# Altium PCB COMBINED.PcbDoc (part 1 of 3)
Units mil, origin at the board's own origin, x right, y up, seen from the top; angles counter-clockwise.
Board outline 6800 x 2100 mil, 4 copper layers (Top Layer, Mid-Layer 1, Mid-Layer 2, Bottom Layer); 221 components, 0 nets, 1007 pads, 208 vias.
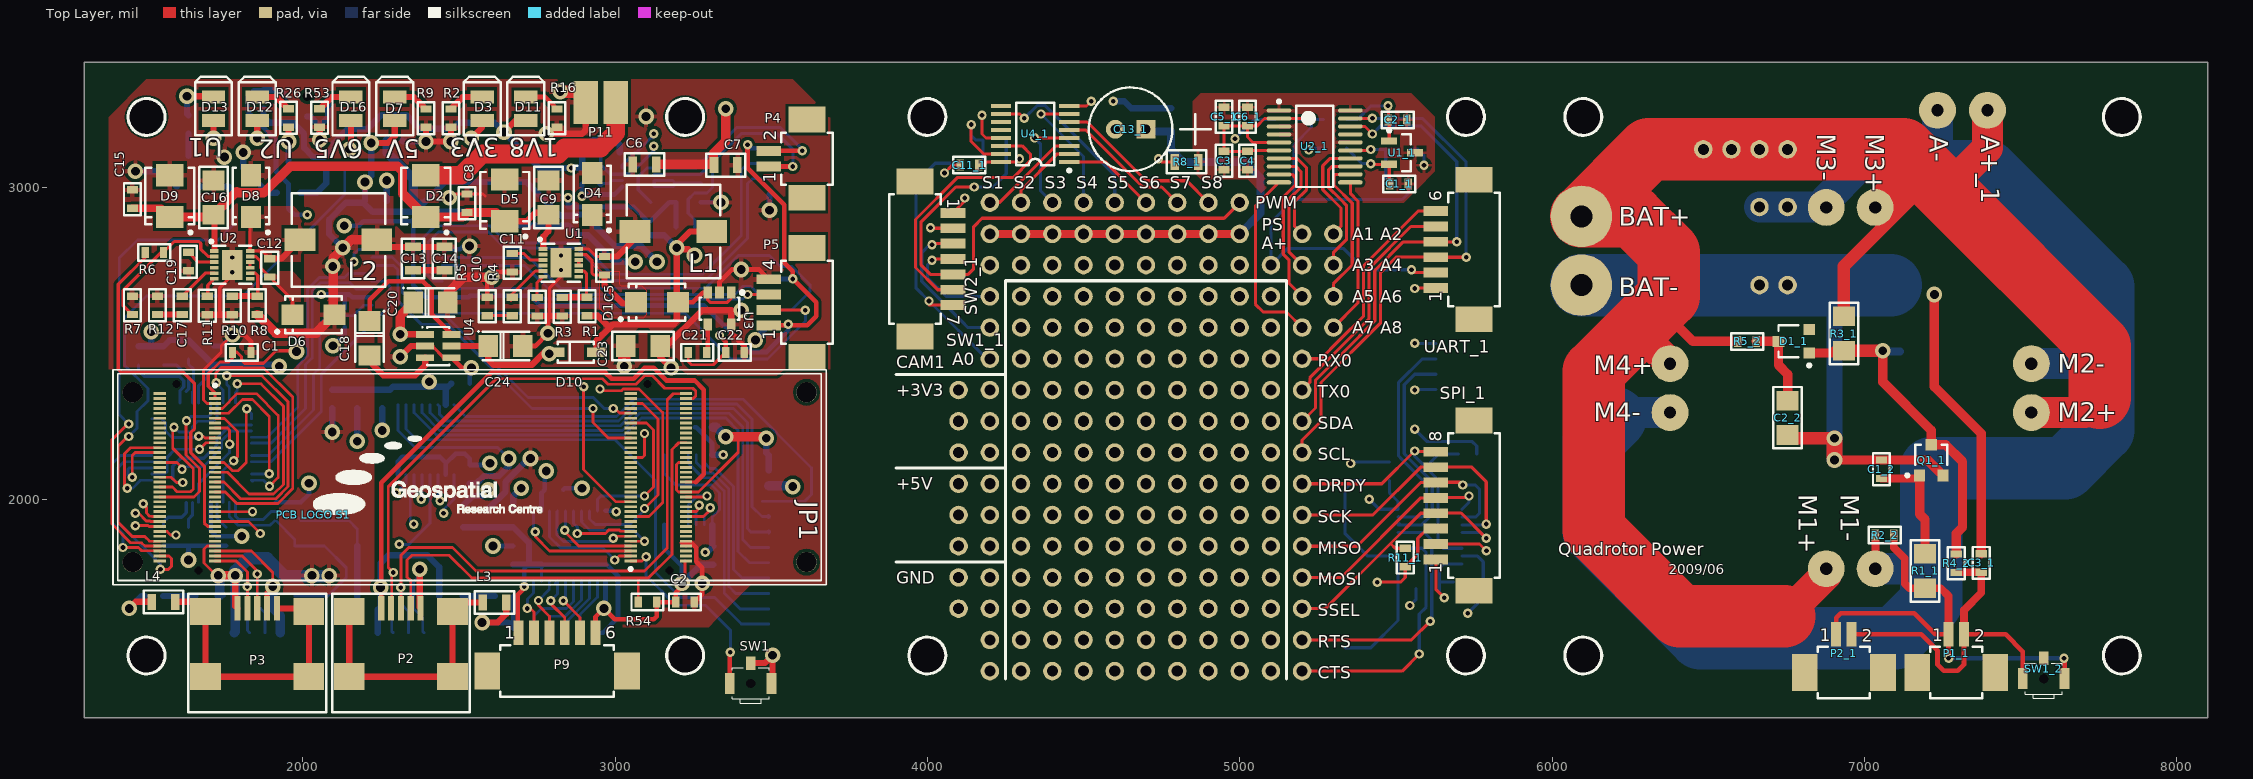
[diagram p0: Top Layer view]
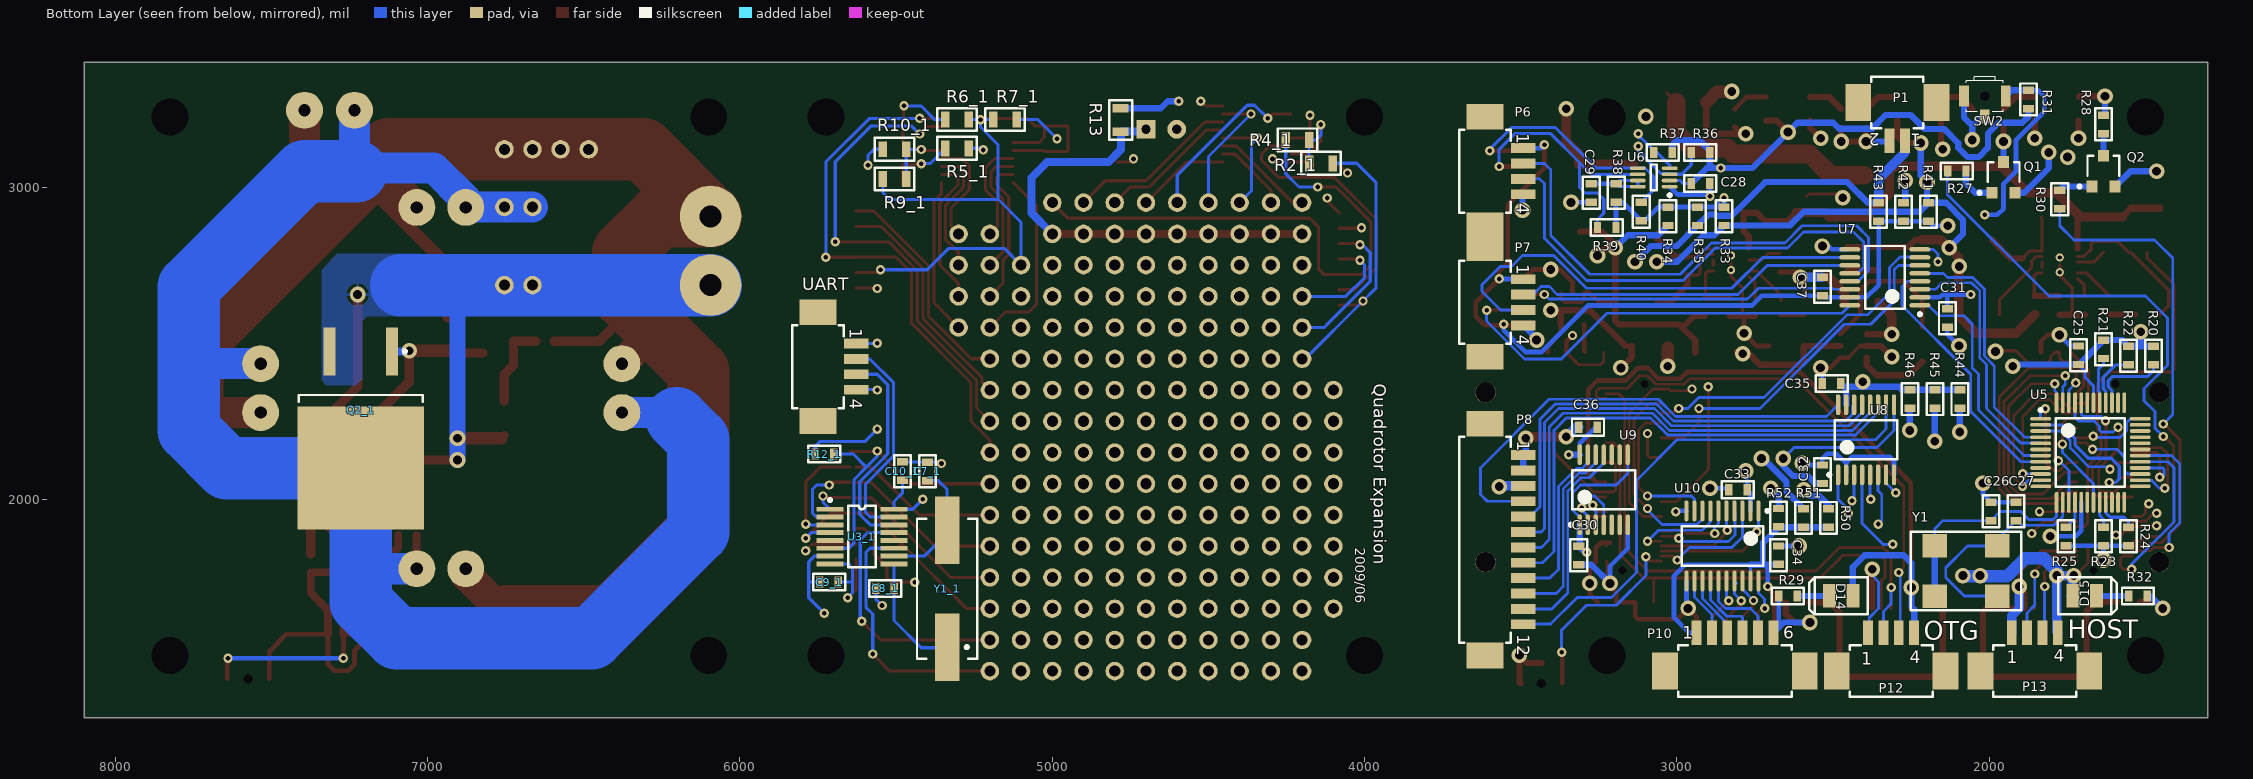
[diagram p1: Bottom Layer view, seen from below]
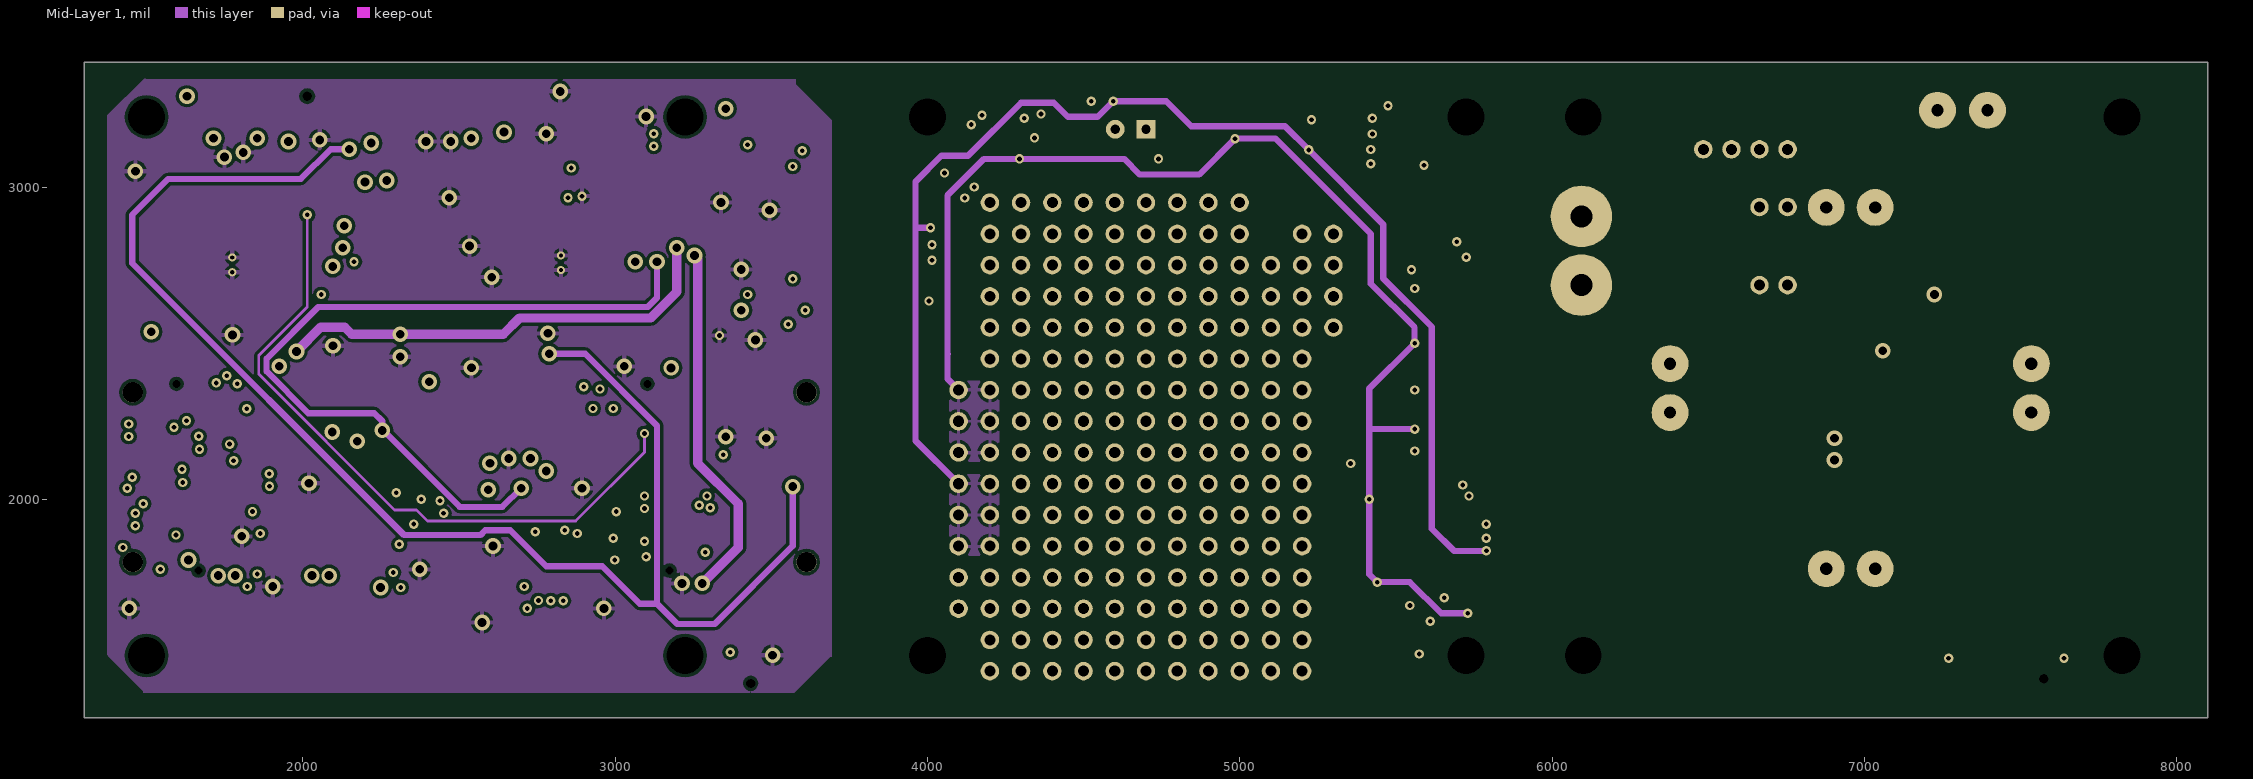
[diagram p2: Mid-Layer 1]
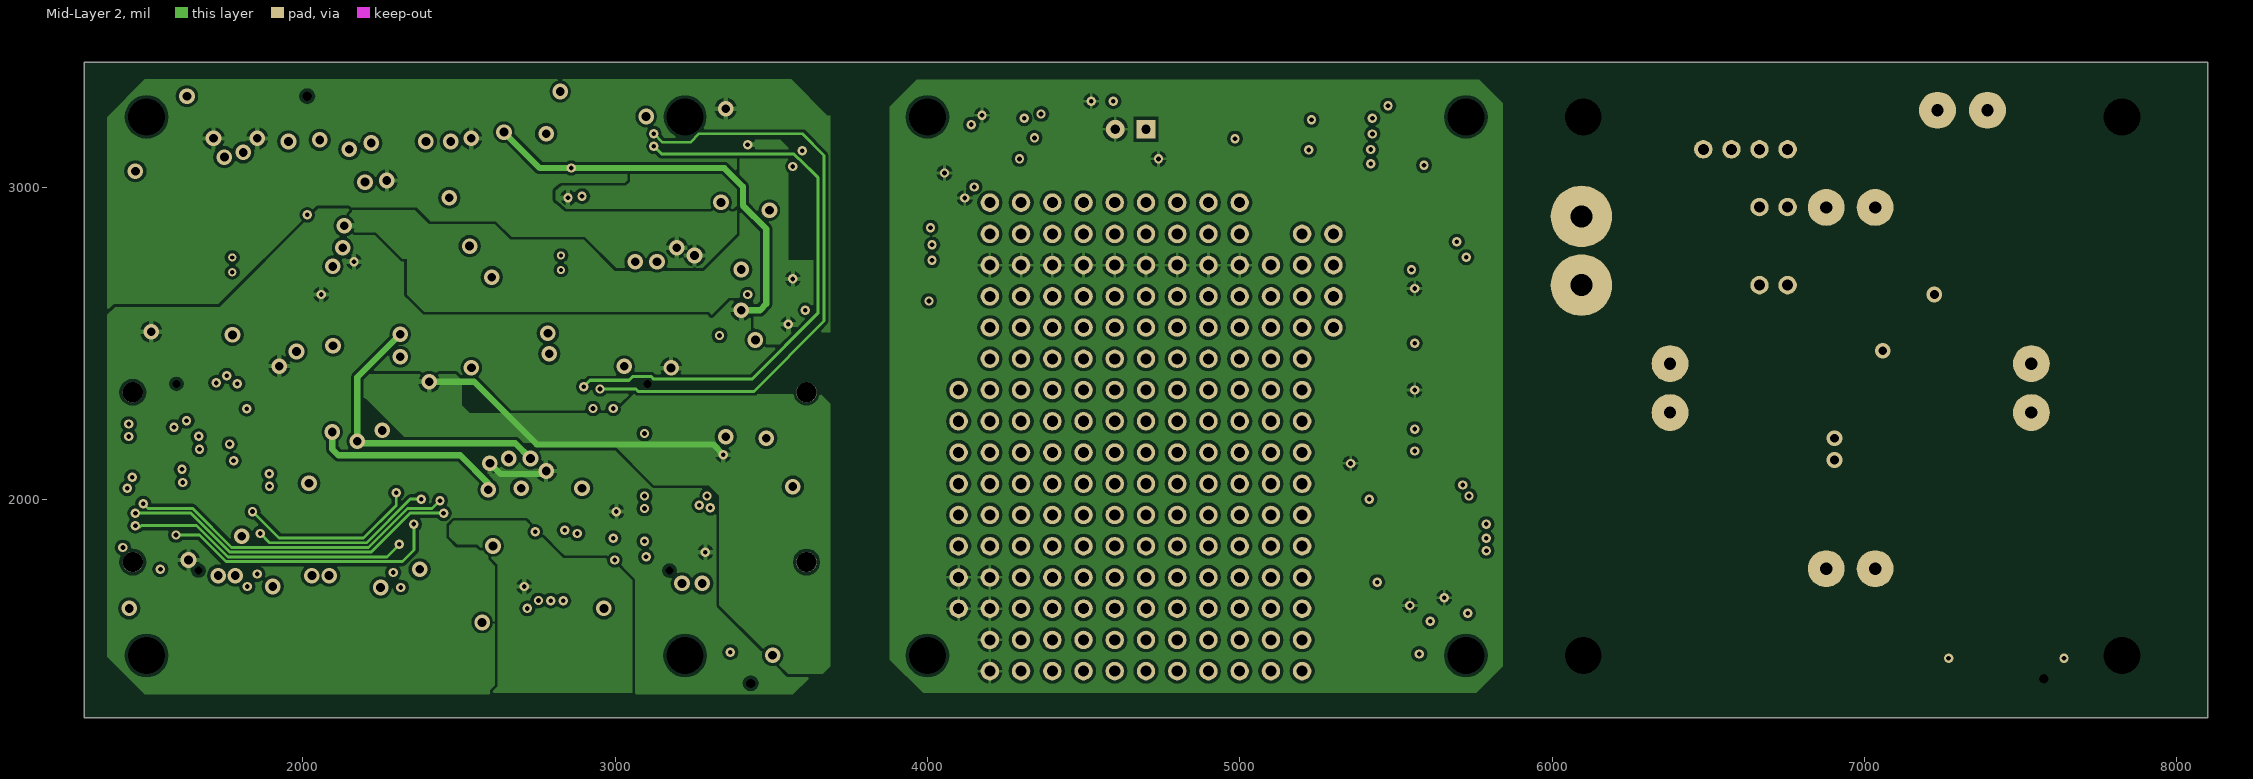
[diagram p3: Mid-Layer 2]

## Layer stack, top to bottom
Top Layer: signal copper 1.4
Dielectric: dielectric 12.6, FR-4, Dk 4.8
Mid-Layer 1: signal copper 1.4
Dielectric: dielectric 12.6, FR-4, Dk 4.8
Mid-Layer 2: signal copper 1.4
Dielectric: dielectric 12.6, FR-4, Dk 4.8
Bottom Layer: signal copper 1.4

## Board outline
1300,1300 1300,3400 8100,3400 8100,1300

## Design rules (kind name [scope] priority, off if disabled: settings)
Clearance [All] p1 off: gap=10
ComponentClearance [All] p1 off: gap=10 collisioncheckmode=3 verticalgap=10 showdistances=FALSE
DiffPairsRouting [All] p1 off: maxlimit=10 minlimit=10 mostfreqgap=10 maxuncoupledlength=500
FanoutControl Fanout_BGA [IsBGA] p1 off: bgadir=Out bgaviamode=Centered fanoutstyle=Auto fanoutdirection=Alternating viagrid=1 // Fanout_BGA (Default Rule)
FanoutControl Fanout_LCC [IsLCC] p2 off: bgadir=Out bgaviamode=Centered fanoutstyle=Auto fanoutdirection=Alternating viagrid=1 // Fanout_LCC (Default Rule)
FanoutControl Fanout_SOIC [IsSOIC] p3 off: bgadir=Out bgaviamode=Centered fanoutstyle=Auto fanoutdirection=Alternating viagrid=1 // Fanout_SOIC (Default Rule)
FanoutControl Fanout_Small [(CompPinCount < 5)] p4 off: bgadir=Out bgaviamode=Centered fanoutstyle=Auto fanoutdirection=OutThenIn viagrid=1 // Fanout_Small (Default Rule)
FanoutControl Fanout_Default [All] p5 off: bgadir=Out bgaviamode=Centered fanoutstyle=Auto fanoutdirection=Alternating viagrid=1 // Fanout_Default (Default Rule)
Height [All] p1 off: minheight=0 maxheight=1000 prefheight=500
HoleSize [All] p1 off: absolutevalues=TRUE maxlimit=100 minlimit=1 maxpercent=80.000 minpercent=20.000
HoleToHoleClearance [All] p1 off: gap=10 allowstackedmicrovias=TRUE
LayerPairs [All] p1 off: enforce=TRUE
MinimumSolderMaskSliver [All] p1 off: minsoldermaskwidth=10
NetAntennae [All] p1 off: netantennaetolerance=0
PasteMaskExpansion [All] p1 off: expansion=0
PlaneClearance [All] p1 off: clearance=20
PlaneConnect [All] p1 off: planeconnectstyle=Relief reliefexpansion=20 reliefentries=4 reliefconductorwidth=10 reliefairgap=10
PolygonConnect [All] p1 off: connectstyle=Relief reliefconductorwidth=10 reliefentries=4 polygonreliefangle="90 Angle"
RoutingCorners [All] p1 off: cornerstyle=45-Degree minsetback=100 maxsetback=100
RoutingLayers [All] p1 off: top layer_v5=TRUE mid layer 1_v5=TRUE mid layer 2_v5=TRUE bottom layer_v5=TRUE
RoutingPriority [All] p1 off: routingpriority=0
RoutingTopology [All] p1 off: topology=Shortest
RoutingVias [All] p1 off: holewidth=28 width=50 viastyle="Through Hole" minholewidth=28 minwidth=50 maxholewidth=28 maxwidth=50
ShortCircuit [All] p1 off: allowed=FALSE
SilkToSilkClearance [All] p1 off: silktosilkclearance=10
SilkscreenOverComponentPads [All] p1 off: minsilkscreentomaskgap=10
SolderMaskExpansion [All] p1 off: expansion=4
TestPointUsage [All] p1 off: valid=0 allowmultiple=FALSE
Testpoint [All] p1 off: side=15 testpointundercomponent=TRUE minsize=40 maxsize=100 preferedsize=60 minholesize=0 maxholesize=40 preferedholesize=32 testpointgrid=1 style=1023 order=0123456789
UnRoutedNet [All] p1 off:
Width [All] p1 off: maxlimit=10 minlimit=10 preferedwidth=10

## Components (designator, comment, footprint, x,y, rotation, side; value= is the part's Value field where it differs from the comment)
A0 "" PAD_ROUND 4200,2450 r0 top locked
A1 "" PAD_ROUND 5200,2850 r90 top locked
A2 "" PAD_ROUND 5300,2850 r90 top locked
A3 "" PAD_ROUND 5200,2750 r90 top locked
A4 "" PAD_ROUND 5300,2750 r0 top locked
A5 "" PAD_ROUND 5200,2650 r90 top locked
A6 "" PAD_ROUND 5300,2650 r0 top locked
A7 "" PAD_ROUND 5200,2550 r0 top locked
A8 "" PAD_ROUND 5300,2550 r0 top locked
A+ "" PAD_ROUND 5100,2750 r0 top locked
A+_1 "" BOOZ_MOTOR#1 7394.33,3245.83 r90 top locked (schematic designator A+)
A- "" BOOZ_MOTOR#1 7234.33,3245.83 r90 top locked
BAT+ "" BOOZ_POWER 6094.33,2905.83 r270 top locked
BAT- "" BOOZ_POWER 6094.33,2685.83 r90 top locked
C1 "100nF" 0603 1834.33,2470.83 r180 top locked
C1_1 "100nF" 0603 5540,3010 r180 top locked (schematic designator C1)
C1_2 "100nF" 0603 7054.33,2125.83 r270 top locked (schematic designator C1)
C2 "100nF" 0603 3194.33,1670.83 r0 top locked
C2_1 "100nF" 0603 5535,3215 r180 top locked (schematic designator C2)
C2_2 "CP_10uF_25V_1206" 1206 6754.33,2205.83 r90 top locked (schematic designator C2)
C3 "1uF" 0603 4950,3055 r90 top locked
C3_1 "1uF" 0603 7374.33,1825.83 r270 top locked (schematic designator C3)
C4 "100nF" 0603 5025,3055 r90 top locked
C5 "CP_470n 0603 25V X5R" 0603 2966.54,2777.52 r270 top locked
C5_1 "100nF" 0603 4950,3255 r270 top locked (schematic designator C5)
C6 "10uF" 0805 3094.33,3070.83 r180 top locked
C6_1 "100nF" 0603 5025,3255 r270 top locked (schematic designator C6)
C7 "10uF" 0805 3354.33,3070.83 r0 top locked
C7_1 "Cap" 0603 5400,2060 r90 bottom locked (schematic designator C7)
C8 "100nF" 0603 2526.54,2977.52 r270 top locked
C8_1 "Cap" 0603 5565,1715 r180 bottom locked (schematic designator C8)
C9 "CP_2u2 1206" 1206 2786.54,2910.83 r90 top locked
C9_1 "100nF" 0603 5685,1735 r0 bottom locked (schematic designator C9)
C10 "CP_330pF 0603" 0603 2670.87,2647.17 r270 top locked
C10_1 "100nF" 0603 5480,2120 r270 bottom locked (schematic designator C10)
C11 "CP_470n 0603 25V X5R" 0603 2670.87,2787.17 r270 top locked
C11_1 "100nF" 0603 4105,3070 r0 top locked (schematic designator C11)
C12 "CP_470n 0603 25V X5R" 0603 1894.33,2770.83 r270 top locked
C13 "10uF" 0805 2354.33,2770.83 r270 top locked
C13_1 "CP_POL_100uF_25V_6.3mm" CAP_ELECTRO_6.3x11 4700,3185 r180 top locked (schematic designator C13)
C14 "10uF" 0805 2454.33,2770.83 r270 top locked
C15 "100nF" 0603 1454.33,2990.83 r270 top locked
C16 "CP_2u2 1206" 1206 1714.33,2910.83 r90 top locked
C17 "CP_330pF 0603" 0603 1614.33,2650.83 r270 top locked
C18 "10uF" 1206P 2214.33,2570.83 r270 top locked
C19 "CP_470n 0603 25V X5R" 0603 1634.33,2790.83 r270 top locked
C20 "10uF" 1206P 2354.33,2630.83 r0 top locked
C21 "10n" 0603 3234.33,2470.83 r0 top locked
C22 "100nF" 0603 3354.33,2470.83 r0 top locked
C23 "CP_2u2_50V_1206" 1206 3034.33,2490.83 r0 top locked
C24 "10uF" 1206P 2594.33,2490.83 r0 top locked
C25 "100nF" 0603 1714.33,2490.83 r270 bottom locked
C26 "18pF" 0603 1994.33,1990.83 r270 bottom locked
C27 "18pF" 0603 1914.33,1990.83 r270 bottom locked
C28 "100nF" 0603 2954.33,3010.83 r180 bottom locked
C29 "100nF" 0603 3274.33,3010.83 r270 bottom locked
C30 "100nF" 0603 3314.33,1790.83 r90 bottom locked
C31 "100nF" 0603 2134.33,2550.83 r90 bottom locked
C32 "100nF" 0603 2534.33,2050.83 r90 bottom locked
C33 "100nF" 0603 2834.33,2030.83 r180 bottom locked
C34 "100nF" 0603 2674.33,1850.83 r270 bottom locked
C35 "100nF" 0603 2534.33,2370.83 r180 bottom locked
C36 "100nF" 0603 3314.33,2230.83 r180 bottom locked
C37 "100nF" 0603 2534.33,2710.83 r270 bottom locked
CAM1 "7 Pin Header" CONN_7X1_SMT_RA_1.25MM 3960,2745 r270 top locked
CTS "" PAD_ROUND 5200,1450 r90 top locked
D1 "2A/40V" SMA_DIODE 3134.33,2630.83 r180 top locked
D1_1 "BAS70" SOT23 6774.33,2505.83 r90 top locked (schematic designator D1)
D2 "2A/100V" SMB_DIODE 2394.33,2970.83 r270 top locked
D3 "LED Green" Diode_0805 2574.33,3250.83 r90 top locked
D4 "2A/40V" SMA_DIODE 2926.54,2977.52 r270 top locked
D5 "TVS 40V" SMB_DIODE 2646.54,2957.52 r270 top locked
D6 "2A/40V" SMA_DIODE 2034.33,2590.83 r180 top locked
D7 "LED Green" Diode_0805 2294.33,3250.83 r90 top locked
D8 "2A/40V" SMA_DIODE 1834.33,2970.83 r270 top locked
D9 "TVS 40V" SMB_DIODE 1574.33,2970.83 r270 top locked
D10 "MBR0520LT1G" SOD123 2874.33,2470.83 r180 top locked
D11 "LED Red" Diode_0805 2714.33,3250.83 r90 top locked
D12 "LED Red" Diode_0805 1854.33,3250.83 r90 top locked
D13 "LED Green" Diode_0805 1714.33,3250.83 r90 top locked
D14 "LED Green" Diode_0805 2474.33,1690.83 r0 bottom locked
D15 "LED Green" Diode_0805 1694.33,1690.83 r180 bottom locked
D16 "LED Green" Diode_0805 2154.33,3250.83 r90 top locked
DRDY "" PAD_ROUND 5200,2050 r90 top locked
JP1 "Overo Earth" OVERO 2534.33,2070.83 r0 top locked
L1 "10uH" WE-PD 3186.54,2857.52 r0 top locked
L2 "10uH" WE-PD 2114.33,2830.83 r0 top locked
L3 "22uH" 0805 2614.33,1670.83 r0 top locked
L4 "22uH" 0805 1554.33,1670.83 r180 top locked
M1+ "" BOOZ_MOTOR#2 6834.33,1705.83 r90 top locked
M1- "" BOOZ_MOTOR#3 7074.33,1705.83 r90 top locked
M2+ "" BOOZ_MOTOR#4 7594.33,2045.83 r90 top locked
M2- "" BOOZ_MOTOR#5 7634.33,2445.83 r90 top locked
M3+ "" BOOZ_MOTOR#6 8214.33,2945.83 r90 top locked
M3- "" BOOZ_MOTOR#7 6879.33,3020.83 r90 top locked
M4+ "" BOOZ_MOTOR#8 6274.33,2645.83 r90 top locked
M4- "" BOOZ_MOTOR#9 6274.33,2345.83 r90 top locked
MISO "" PAD_ROUND 5200,1850 r90 top locked
MOSI "" PAD_ROUND 5200,1750 r90 top locked
P1 "2 Pin Header" CONN_2X1_SMT_RA_1.25MM 2294.33,3270.83 r0 bottom locked
P1_1 "2 Pin Header" CONN_2X1_SMT_RA_1.25MM 7294.33,1445.83 r0 top locked (schematic designator P1)
P2 "MINI-USB Type B" Hir_MINI_USB_B 2314.33,1650.83 r0 top locked
P2_1 "2 Pin Header" CONN_2X1_SMT_RA_1.25MM 6934.33,1445.83 r0 top locked (schematic designator P2)
P3 "MINI-USB Type B" Hir_MINI_USB_B 1854.33,1650.83 r0 top locked
P4 "2 Pin Header" CONN_2X1_SMT_RA_1.25MM 3614.33,3090.83 r90 top locked
P5 "4 Pin Header" CONN_4X1_SMT_RA_1.25MM 3614.33,2630.83 r90 top locked
P6 "4 Pin Header" CONN_4X1_SMT_RA_1.25MM 3614.33,3050.83 r270 bottom locked
P7 "4 Pin Header" CONN_4X1_SMT_RA_1.25MM 3614.33,2630.83 r270 bottom locked
P8 "12 Pin Header" CONN_12X1_SMT_RA_1.25MM 3614.33,1870.83 r270 bottom locked
P9 "6 Pin Header" CONN_6X1_SMT_RA_1.25MM 2814.33,1450.83 r0 top locked
P10 "6 Pin Header" CONN_6X1_SMT_RA_1.25MM 2814.33,1450.83 r180 bottom locked
P11 "2 Pin Header" POWER_PADS 2954.33,3270.83 r180 top locked
P12 "4 Pin Header" CONN_4X1_SMT_RA_1.25MM 2314.33,1450.83 r180 bottom locked
P13 "4 Pin Header" CONN_4X1_SMT_RA_1.25MM 1854.33,1450.83 r180 bottom locked
"PCB LOGO S1" "GRC_LOGO_SMALL" GRC_LOGO_20x10MM 2034.33,1950.83 r0 top locked
PS "" PAD_ROUND 5000,2850 r90 top locked
PWM "" PAD_ROUND 5000,2950 r90 top locked
Q1 "BC847" SOT23 1954.33,3030.83 r180 bottom locked
Q1_1 "BC847" SOT23 7214.33,2125.83 r0 top locked (schematic designator Q1)
Q2 "BC847" SOT23 1634.33,3050.83 r180 bottom locked
Q2_1 "FDB8442" TO-263AB 7214.33,2225.83 r270 bottom locked (schematic designator Q2)
R1 "24k9" 0603 2910.87,2647.17 r270 top locked
R1_1 "220R" 1206 7194.33,1825.83 r270 top locked (schematic designator R1)
R2 "150R" 0603 2474.33,3190.83 r90 top locked
R2_1 "0R0" 0805 4140,3075 r0 bottom locked (schematic designator R2)
R2_2 "470k" 0603 7094.33,1885.83 r180 top locked (schematic designator R2)
R3 "8k06" 0603 2830.87,2587.17 r90 top locked
R3_1 "10k" 1206 6934.33,2475.83 r90 top locked (schematic designator R3)
R4 "53k6" 0603 2750.87,2587.17 r90 top locked
R4_1 "0R0" 0805 4215,3150 r0 bottom locked (schematic designator R4)
R4_2 "1M" 0603 7294.33,1765.83 r90 top locked (schematic designator R4)
R5 "40k2" 0603 2590.87,2647.17 r270 top locked
R5_1 "0R0" 0805 5305,3125 r180 bottom locked (schematic designator R5)
R5_2 "10k" 0603 6654.33,2505.83 r180 top locked (schematic designator R5)
R6 "0R0" 0603 1554.33,2790.83 r180 top locked
R6_1 "0R0" 0805 5305,3215 r0 bottom locked (schematic designator R6)
R7 "1k" 0603 1454.33,2650.83 r270 top locked
R7_1 "0R0" 0805 5151.42,3215 r0 bottom locked (schematic designator R7)
R8 "42k2" 0603 1854.33,2650.83 r270 top locked
R8_1 "0R0" 0805 4830,3079.76 r180 top locked (schematic designator R8)
R9 "330R" 0603 2394.33,3190.83 r90 top locked
R9_1 "0R0" 0805 5505,3025 r0 bottom locked (schematic designator R9)
R10 "8k06" 0603 1774.33,2590.83 r90 top locked
R10_1 "0R0" 0805 5505,3120 r0 bottom locked (schematic designator R10)
R11 "53k6" 0603 1694.33,2590.83 r90 top locked
R11_1 "100k" 0603 5530,1843.33 r270 top locked (schematic designator R11)
R12 "40k2" 0603 1534.33,2650.83 r270 top locked
R12_1 "100k" 0603 5700,2145 r0 bottom locked (schematic designator R12)
R13 "0R0" 0805 4780,3215 r270 bottom locked
R16 "150R" 0603 2814.33,3190.83 r90 top locked
R20 "100k" 0603 1474.33,2430.83 r90 bottom locked
R21 "100k" 0603 1634.33,2450.83 r90 bottom locked
R22 "100k" 0603 1554.33,2430.83 r90 bottom locked
R23 "100k" 0603 1634.33,1910.83 r270 bottom locked
R24 "100k" 0603 1554.33,1910.83 r270 bottom locked
R25 "100k" 0603 1754.33,1910.83 r270 bottom locked
R26 "180R" 0603 1954.33,3250.83 r270 top locked
R27 "5k6" 0603 2074.33,3050.83 r0 bottom locked
R28 "150R" 0603 1634.33,3229.88 r270 bottom locked
R29 "330R" 0603 2615.28,1690.83 r0 bottom locked
R30 "5k6" 0603 1774.33,2989.88 r270 bottom locked
R31 "100k" 0603 1874.33,3250.83 r90 bottom locked
R32 "330R" 0603 1494.33,1690.83 r0 bottom locked
R33 "0R0" 0603 2849.33,2876.77 r90 bottom locked
R34 "0R0" 0603 3029.33,2876.77 r90 bottom locked
R35 "0R0" 0603 2934.33,2876.77 r90 bottom locked
R36 "57k" 0603 2954.33,3110.83 r180 bottom locked
R37 "57k" 0603 3074.33,3110.83 r180 bottom locked
R38 "200k" 0603 3194.33,3010.83 r270 bottom locked
R39 "57k" 0603 3254.33,2870.83 r180 bottom locked
R40 "57k" 0603 3114.33,2950.83 r270 bottom locked
R41 "0R0" 0603 2194.33,2949.88 r270 bottom locked
R42 "0R0" 0603 2274.33,2949.88 r270 bottom locked
R43 "0R0" 0603 2354.33,2949.88 r270 bottom locked
R44 "0R0" 0603 2094.33,2291.77 r90 bottom locked
R45 "0R0" 0603 2174.33,2291.77 r90 bottom locked
R46 "0R0" 0603 2254.33,2291.77 r90 bottom locked
R50 "0R0" 0603 2514.33,1969.88 r270 bottom locked
R51 "0R0" 0603 2594.33,1969.88 r270 bottom locked
R52 "0R0" 0603 2674.33,1970.83 r270 bottom locked
R53 "523R" 0603 2054.33,3250.83 r270 top locked
R54 "0R0" 0603 3074.33,1670.83 r0 top locked
RTS "" PAD_ROUND 5200,1550 r90 top locked
RX0 "" PAD_ROUND 5200,2450 r0 top locked
S1 "3 Pin Header" G_HDR1X3_RND_PIN1_NO_OVERLAY 4200,2950 r270 top locked
S2 "3 Pin Header" G_HDR1X3_RND_PIN1_NO_OVERLAY 4300,2950 r270 top locked
S3 "3 Pin Header" G_HDR1X3_RND_PIN1_NO_OVERLAY 4400,2950 r270 top locked
S4 "3 Pin Header" G_HDR1X3_RND_PIN1_NO_OVERLAY 4500,2950 r270 top locked
S5 "3 Pin Header" G_HDR1X3_RND_PIN1_NO_OVERLAY 4600,2950 r270 top locked
S6 "3 Pin Header" G_HDR1X3_RND_PIN1_NO_OVERLAY 4700,2950 r270 top locked
S7 "3 Pin Header" G_HDR1X3_RND_PIN1_NO_OVERLAY 4800,2950 r270 top locked
S8 "3 Pin Header" G_HDR1X3_RND_PIN1_NO_OVERLAY 4900,2950 r270 top locked
SCK "" PAD_ROUND 5200,1950 r0 top locked
SCL "Value" PAD_ROUND 5200,2150 r90 top locked
SDA "" PAD_ROUND 5200,2250 r90 top locked
SPI_1 "8 Pin Header" CONN_8X1_SMT_RA_1.25MM 5750,1980 r90 top locked
SSEL "" PAD_ROUND 5200,1650 r90 top locked
SW1 "Push Button Switch" PUSHBUTTON_B3U 3434.33,1410.83 r180 top locked
SW1_1 "" PAD_ROUND 4200,2550 r0 top locked (schematic designator SW1)
SW1_2 "Push Button Switch" PUSHBUTTON_B3U 7574.33,1425.83 r180 top locked (schematic designator SW1)
SW2 "Push Button Switch" PUSHBUTTON_B3U 2014.33,3290.83 r180 bottom locked
SW2_1 "" PAD_ROUND 4200,2650 r0 top locked (schematic designator SW2)
TX0 "" PAD_ROUND 5200,2350 r0 top locked
U1 "IC_LT3500EDD" 12-DFN 2826.54,2757.52 r270 top locked
U1_1 "LM3480IM3-3.3" MF03A_N 5520,3110 r0 top locked (schematic designator U1)
U2 "IC_LT3500EDD" 12-DFN 1774.33,2750.83 r270 top locked
U2_1 "AD7997" TSOP65P640-20AM 5240,3130 r0 top locked (schematic designator U2)
U3 "MIC5247-1.8" SOT23-5 3334.33,2610.83 r180 top locked
U3_1 "MAX3100CEE+" QSOP16_MAX3100 5609.33,1880.83 r270 bottom locked (schematic designator U3)
U4 "LM2665" SOT23-6 2434.33,2490.83 r270 top locked
U4_1 "CD4017BCM" PW016 4345,3170 r90 top locked (schematic designator U4)
U5 "C16C852LIB-S" LQFP-48 1676.18,2149.88 r180 bottom locked
U6 "PCA9306DC" VSSOP-8 3074.33,3030.83 r0 bottom locked
U7 "IC_TXB0106PWR" TSSOP-16_PW 2334.33,2710.83 r0 bottom locked
U8 "IC_TXB0106PWR" TSSOP-16_PW 2394.33,2190.83 r90 bottom locked
U9 "IC_TXB0104PWR" TSSOP-14_PW 3234.33,2030.83 r90 bottom locked
U10 "IC_TXB0108PWR" TSSOP-20_PW 2854.33,1850.83 r270 bottom locked
UART "4 Pin Header" CONN_4X1_SMT_RA_1.25MM 5750,2425 r270 bottom locked
UART_1 "6 Pin Header" CONN_6X1_SMT_RA_1.25MM 5750,2800 r90 top locked
Y1 "18.432MHZ" ConWin_Xtal 2074.33,1770.83 r180 bottom locked
Y1_1 "3.6864MHz" HC49/4h_SMX 5336.73,1712.8 r90 bottom locked (schematic designator Y1)

## Footprints (in the part's own frame and the unit in brackets; to place one, negate y for a bottom-side part, rotate by r counter-clockwise, add the part's x,y. Pads: shape width x height; smd on the part's side, far side on the other; paste and mask are expansions set on the pad)
12-DFN [mm] "DD Package - 12-Lead Plastic DFN (3mm × 3mm)"
  rect 0.3x0.7 smd: 1(-1.125,-1.45) 2(-0.675,-1.45) 3(-0.225,-1.45) 4(0.225,-1.45) 5(0.675,-1.45) 6(1.125,-1.45) 7(1.125,1.45) 8(0.675,1.45) 9(0.225,1.45) 10(-0.225,1.45) 11(-0.675,1.45) 12(-1.125,1.45)
  round 0.66 hole 0.33: 13(-0.6,0) 13(0.6,0)
  rect 2.43x1.7 smd: 13(0,0)
  silkscreen extent -2.02,-1.82 1.55,1.55
0603 [mm] "Non polarized 0603 footprint"
  rect 0.6x0.9 smd: 1(0,0) 2(1.5,0)
  silkscreen extent -0.55,-0.67 2.05,0.67
0805 [mm]
  rect 0.7x1.3 smd: 1(-0.95,-0.025) 2(0.95,-0.025)
  silkscreen extent -1.6,-0.95 1.6,0.9
1206 [mm] "Non-polarized 1206 footprint"
  rect 1.6x1.8 smd: 1(0,0) 2(2.8,0)
  silkscreen extent -1.09,-1.17 3.91,1.16
1206P [mm] "Polarized 1206 footprint"
  rect 1.6x1.8 smd: 1(0,0) 2(2.8,0)
  silkscreen extent -0.8,-1.17 3.32,1.17
BOOZ_MOTOR#1 [mm] "Motor power pad for booz power board"
  round 3 hole 1: 1(0,0)
BOOZ_MOTOR#2 [mm] "Motor power pad for booz power board"
  round 3 hole 1: 1(1.832,-1.108)
BOOZ_MOTOR#3 [mm] "Motor power pad for booz power board"
  round 3 hole 1: 1(1.832,1.008)
BOOZ_MOTOR#4 [mm] "Motor power pad for booz power board"
  round 3 hole 1: 1(5.896,1.516)
BOOZ_MOTOR#5 [mm] "Motor power pad for booz power board"
  round 3 hole 1: 1(-0.284,2.532)
BOOZ_MOTOR#6 [mm] "Motor power pad for booz power board"
  round 3 hole 1: 1(-0.284,29.964)
BOOZ_MOTOR#7 [mm] "Motor power pad for booz power board"
  round 3 hole 1: 1(-2.189,0.035)
BOOZ_MOTOR#8 [mm] "Motor power pad for booz power board"
  round 3 hole 1: 1(-5.364,-2.632)
BOOZ_MOTOR#9 [mm] "Motor power pad for booz power board"
  round 3 hole 1: 1(-1.724,-2.632)
BOOZ_POWER [mm] "power pad for booz power board"
  round 5 hole 1.8: 1(0,0)
CAP_ELECTRO_6.3x11 [mil] "Electrolytic Capacitor D=6.3, L=11 (Minature Aluminium YXF)"
  rect 60x60 hole 30: 1(0,0)
  round 60 hole 30: 2(98.43,0)
  silkscreen extent -207,-134 183,134
CONN_2X1_SMT_RA_1.25MM [mm] "PicoBlade 5326 Series Header"
  rect 0.8x2 smd: 1(-0.625,3.1) 2(0.625,3.1)
  rect 2.1x3 smd: " "(3.175,0) ""(-3.175,0)
  silkscreen extent -2.12,-2.1 2.12,2.1
CONN_4X1_SMT_RA_1.25MM [mm] "PicoBlade 5326 Series Header"
  rect 0.8x2 smd: 1(-1.875,3.1) 2(-0.625,3.1) 3(0.625,3.1) 4(1.875,3.1)
  rect 2.1x3 smd: " "(4.425,0) ""(-4.425,0)
  silkscreen extent -3.37,-2.1 3.37,2.1
CONN_6X1_SMT_RA_1.25MM [mm] "PicoBlade 5326 Series Header"
  rect 0.8x2 smd: 1(-3.125,3.1) 2(-1.875,3.1) 3(-0.625,3.1) 4(0.625,3.1) 5(1.875,3.1) 6(3.125,3.1)
  rect 2.1x3 smd: " "(5.675,0) ""(-5.675,0)
  silkscreen extent -4.62,-2.1 4.62,2.1
CONN_7X1_SMT_RA_1.25MM [mm] "PicoBlade 5326 Series Header"
  rect 0.8x2 smd: 1(-4.375,3.1) 2(-3.125,3.1) 3(-1.875,3.1) 4(-0.625,3.1) 5(0.625,3.1) 6(1.875,3.1) 7(3.125,3.1)
  rect 2.1x3 smd: " "(5.675,0) ""(-6.925,0)
  silkscreen extent -5.87,-2.1 4.62,2.1
CONN_8X1_SMT_RA_1.25MM [mm] "PicoBlade 5326 Series Header"
  rect 0.8x2 smd: 1(-4.375,3.1) 2(-3.125,3.1) 3(-1.875,3.1) 4(-0.625,3.1) 5(0.625,3.1) 6(1.875,3.1) 7(3.125,3.1) 8(4.375,3.1)
  rect 2.1x3 smd: " "(6.925,0) ""(-6.925,0)
  silkscreen extent -5.87,-2.1 5.87,2.1
CONN_12X1_SMT_RA_1.25MM [mm] "PicoBlade 5326 Series Header"
  rect 0.8x2 smd: 1(-6.875,3.1) 2(-5.625,3.1) 3(-4.375,3.1) 4(-3.125,3.1) 5(-1.875,3.1) 6(-0.625,3.1) 7(0.625,3.1) 8(1.875,3.1) 9(3.125,3.1) 10(4.375,3.1) 11(5.625,3.1) 12(6.875,3.1)
  rect 2.1x3 smd: " "(9.425,0) ""(-9.425,0)
  silkscreen extent -8.37,-2.1 8.37,2.1
ConWin_Xtal [mm] "ConWin Xtal FootPrint"
  rect 2x1.9 smd: 1(-2.54,-2.05) 1(-2.54,2.05) 2(2.54,-2.05) 2(2.54,2.05)
  silkscreen extent -4.5,-3.2 4.5,3.2, body extent -3.88,-2.54 3.81,2.61, height 1.77
Diode_0805 [mm] "0805 SMD diode"
  rect 1.05x1.9 smd: 1(-0.95,0) 2(0.95,0)
  silkscreen extent -2.15,-1.5 2.6,1.5
G_HDR1X3_RND_PIN1_NO_OVERLAY [mm] "Connector; Header; 3 Position, Round Pin 1 (Not Square)"
  round 1.5 hole 0.9: 1(0,0) 2(2.54,0) 3(5.08,0)
GRC_LOGO_20x10MM [mil] "GRC logo 2x1cm"
  silkscreen extent -1,2 733,253
HC49/4h_SMX [mm] "Quartz Crystal, SM; Body 13.4 (inc. leads) x 4.9 mm (LxW max)"
  rect 5.5x2 smd: 1(-4.725,0) 2(4.775,0)
  silkscreen extent -5.67,-2.45 5.72,2.45
Hir_MINI_USB_B [mm] "Mini-USB Receptacle Type B - Metal Shield - SMT - With Positioning Post"
  rect 0.5x2 smd: 1(-1.6,0) 2(-0.8,0) 3(0,0) 4(0.8,0) 5(1.6,0)
  rect 2.5x2.2 smd: 6(-4.2,-5.55) 6(-4.2,-0.25) 6(4.2,-5.55) 6(4.2,-0.25)
  silkscreen extent -5.6,-8.45 5.6,1.2
LQFP-48 [mm] "TSQFP, 48-Leads, Body 9.1x9.1mm (max), Pitch 0.50mm, IPC Medium Density"
  oval 1.7x0.3 smd: 1(-4.05,2.75) 2(-4.05,2.25) 3(-4.05,1.75) 4(-4.05,1.25) 5(-4.05,0.75) 6(-4.05,0.25) 7(-4.05,-0.25) 8(-4.05,-0.75) 9(-4.05,-1.25) 10(-4.05,-1.75) 11(-4.05,-2.25) 12(-4.05,-2.75) 25(4.05,-2.75) 26(4.05,-2.25) 27(4.05,-1.75) 28(4.05,-1.25) 29(4.05,-0.75) 30(4.05,-0.25) 31(4.05,0.25) 32(4.05,0.75) 33(4.05,1.25) 34(4.05,1.75) 35(4.05,2.25) 36(4.05,2.75)
  oval 0.3x1.7 smd: 13(-2.75,-4.05) 14(-2.25,-4.05) 15(-1.75,-4.05) 16(-1.25,-4.05) 17(-0.75,-4.05) 18(-0.25,-4.05) 19(0.25,-4.05) 20(0.75,-4.05) 21(1.25,-4.05) 22(1.75,-4.05) 23(2.25,-4.05) 24(2.75,-4.05) 37(2.75,4.05) 38(2.25,4.05) 39(1.75,4.05) 40(1.25,4.05) 41(0.75,4.05) 42(0.25,4.05) 43(-0.25,4.05) 44(-0.75,4.05) 45(-1.25,4.05) 46(-1.75,4.05) 47(-2.25,4.05) 48(-2.75,4.05)
  silkscreen extent -4.18,-2.8 2.8,3.57, body extent -3.5,-3.5 3.5,3.5, height 1.6
MF03A_N [mm] "SOT23, 3-Leads, Body 2.9x1.3mm, Pitch 0.95mm, Lead Span 2.4mm, IPC Medium Density"
  rect 1.3x0.6 smd: 1(-1.05,0.95) 2(-1.05,-0.95) 3(1.05,0)
  silkscreen extent -1.17,-1.5 0.7,1.92, body extent -0.7,-1.5 0.7,1.5, height 1.12
OVERO [mm] "Overo Earth support"
  rect 1x0.23 smd: 1(13.1,-6.8) 2(13.1,-6.4) 3(13.1,-6) 4(13.1,-5.6) 5(13.1,-5.2) 6(13.1,-4.8) 7(13.1,-4.4) 8(13.1,-4) 9(13.1,-3.6) 10(13.1,-3.2) 11(13.1,-2.8) 12(13.1,-2.4) 13(13.1,-2) 14(13.1,-1.6) 15(13.1,-1.2) 16(13.1,-0.8) 17(13.1,-0.4) 18(13.1,0) 19(13.1,0.4) 20(13.1,0.8) 21(13.1,1.2) 22(13.1,1.6) 23(13.1,2) 24(13.1,2.4) 25(13.1,2.8) 26(13.1,3.2) 27(13.1,3.6) 28(13.1,4) 29(13.1,4.4) 30(13.1,4.8) 31(13.1,5.2) 32(13.1,5.6) 33(13.1,6) 34(13.1,6.4) 35(13.1,6.8) 36(17.6,6.8) 36_(-25.2,-6.8) 37(17.6,6.4) 37_(-25.2,-6.4) 38(17.6,6) 38_(-25.2,-6) 39(17.6,5.6) 39_(-25.2,-5.6) 40(17.6,5.2) 40_(-25.2,-5.2) 41(17.6,4.8) 41_(-25.2,-4.8) 42(17.6,4.4) 42_(-25.2,-4.4) 43(17.6,4) 43_(-25.2,-4) 44(17.6,3.6) 44_(-25.2,-3.6) 45(17.6,3.2) 45_(-25.2,-3.2) 46(17.6,2.8) 46_(-25.2,-2.8) 47(17.6,2.4) 47_(-25.2,-2.4) 48(17.6,2) 48_(-25.2,-2) 49(17.6,1.6) 49_(-25.2,-1.6) 50(17.6,1.2) 50_(-25.2,-1.2) 51(17.6,0.8) 51_(-25.2,-0.8) 52(17.6,0.4) 52_(-25.2,-0.4) 53(17.6,0) 53_(-25.2,0) 54(17.6,-0.4) 54_(-25.2,0.4) 55(17.6,-0.8) 55_(-25.2,0.8) 56(17.6,-1.2) 56_(-25.2,1.2) 57(17.6,-1.6) 57_(-25.2,1.6) 58(17.6,-2) 58_(-25.2,2) 59(17.6,-2.4) 59_(-25.2,2.4) 60(17.6,-2.8) 60_(-25.2,2.8) 61(17.6,-3.2) 61_(-25.2,3.2) 62(17.6,-3.6) 62_(-25.2,3.6) 63(17.6,-4) 63_(-25.2,4) 64(17.6,-4.4) 64_(-25.2,4.4) 65(17.6,-4.8) 65_(-25.2,4.8) 66(17.6,-5.2) 66_(-25.2,5.2) 67(17.6,-5.6) 67_(-25.2,5.6) 68(17.6,-6) 68_(-25.2,6) 69(17.6,-6.4) 69_(-25.2,6.4) 70(17.6,-6.8) 70_(-25.2,6.8) _1(-20.7,6.8) _2(-20.7,6.4) _3(-20.7,6) _4(-20.7,5.6) _5(-20.7,5.2) _6(-20.7,4.8) _7(-20.7,4.4) _8(-20.7,4) _9(-20.7,3.6) _10(-20.7,3.2) _11(-20.7,2.8) _12(-20.7,2.4) _13(-20.7,2) _14(-20.7,1.6) _15(-20.7,1.2) _16(-20.7,0.8) _17(-20.7,0.4) _18(-20.7,0) _19(-20.7,-0.4) _20(-20.7,-0.8) _21(-20.7,-1.2) _22(-20.7,-1.6) _23(-20.7,-2) _24(-20.7,-2.4) _25(-20.7,-2.8) _26(-20.7,-3.2) _27(-20.7,-3.6) _28(-20.7,-4) _29(-20.7,-4.4) _30(-20.7,-4.8) _31(-20.7,-5.2) _32(-20.7,-5.6) _33(-20.7,-6) _34(-20.7,-6.4) _35(-20.7,-6.8)
  round 1.65 hole 1.65 unplated: A(-27.4,6.9) A(27.4,6.9) B(-27.4,-6.9) B(27.4,-6.9)
  round 0 hole 0.65 unplated: E(-23.85,7.6) F(-22.05,-7.6) G(14.45,7.6) H(16.25,-7.6)
  silkscreen extent -29,-8.75 29,8.75
PAD_ROUND [mm]
  round 1.5 hole 0.9: 1(0,0)
POWER_PADS [mm] "Power Supply Pads"
  rect 2x3.5 smd: 1(-1.225,0) 2(1.225,0)
PUSHBUTTON_B3U [mm] "Omron ultra small tactile switch"
  round 0 hole 0.75: 0(0,0)
  rect 0.8x1.7 smd: 1(-1.7,0) 2(1.7,0)
  rect 0.8x1.1 smd: 3(0,-1.65)
  silkscreen extent -1.5,-1.25 1.5,1.6
PW016 [mm] "Shrink Small Outline; 16 Leads; Body Width 4.4 mm; Pitch 0.65 mm"
  rect 0.3x1.65 smd: 1(-2.275,-2.775) 2(-1.625,-2.775) 3(-0.975,-2.775) 4(-0.325,-2.775) 5(0.325,-2.775) 6(0.975,-2.775) 7(1.625,-2.775) 8(2.275,-2.775) 9(2.275,2.775) 10(1.625,2.775) 11(0.975,2.775) 12(0.325,2.775) 13(-0.325,2.775) 14(-0.975,2.775) 15(-1.625,2.775) 16(-2.275,2.775)
  silkscreen extent -3.1,-2.9 2.55,1.55
QSOP16_MAX3100 [mm] "SSOP; 16 Leads; Body Width 3.9 mm; Pitch 0.635 mm"
  rect 0.4x2.2 smd: 1(-2.223,-2.6) 2(-1.588,-2.6) 3(-0.953,-2.6) 4(-0.318,-2.6) 5(0.317,-2.6) 6(0.952,-2.6) 7(1.587,-2.6) 8(2.222,-2.6) 9(2.223,2.6) 10(1.588,2.6) 11(0.953,2.6) 12(0.318,2.6) 13(-0.317,2.6) 14(-0.952,2.6) 15(-1.587,2.6) 16(-2.222,2.6)
  silkscreen extent -3.1,-2.73 2.5,1.1
SMA_DIODE [mm] "Diode SMA package"
  rect 1.8x1.65 smd: 1(-1.7,0) 2(1.7,0)
  silkscreen extent -2.3,-1.5 3.07,1.5
SMB_DIODE [mm] "Molded Diode, 2-Leads, Body 4.6x3.9mm, IPC Medium Density"
  rect 1.8x2.25 smd: 1(-1.7,0) 2(1.7,0)
  silkscreen extent -2.3,-2 3.07,2
SOD123 [mm] "SOD-123; 2 Leads; Body 2.7 x 1.6 mm, (LxW)"
  rect 1.6x0.8 smd: 1(-1.7,0) 2(1.7,0)
  silkscreen extent -1.45,-0.85 1.45,0.85
SOT23 [mm] "SOT-23; 3 Leads; Body 3.0 x 2.6 mm, inc. leads (LxW max)"
  rect 0.9x0.95 smd: 1(-0.95,-1.25) 2(0.95,-1.25) 3(0,1.25)
  silkscreen extent -2.07,-1.38 1.3,1.25
SOT23-5 [mm] "SOT23, 5 leads"
  rect 0.7x1 smd: 1(-0.95,-1.3) 2(0,-1.3) 3(0.95,-1.3) 4(0.95,1.3) 5(-0.95,1.3)
  silkscreen extent -1.88,-1.32 1.63,0.9
SOT23-6 [mm] "SOT-23/SC-74A; 6 Leads; Body 3.1 x 3 mm, inc. leads (LxW max)"
  rect 0.55x1.45 smd: 1(-0.95,-1.075) 2(0,-1.075) 3(0.95,-1.075) 4(0.95,1.075) 5(0,1.075) 6(-0.95,1.075)
  silkscreen extent -1.57,-1.35 1.55,0.9
TO-263AB [mm] "D2-PAK, 3-Pads, Body 9.4x10.1mm (max), IPC Medium Density"
  rect 3.9x1 smd: 1(-6.3,2.54) 3(-6.3,-2.54)
  rect 10x10.3 smd: 4(3.2,0)
  silkscreen extent -6.42,-5.05 -2.2,5.05, body extent -2.75,-5.05 6.65,5.05, height 4.7
TSOP65P640-20AM [mm] "TSOP, 20-Leads, Body 6.5x4.4mm, Pitch 0.65mm, IPC Low Density"
  oval 2x0.35 smd: 1(-2.9,2.925) 2(-2.9,2.275) 3(-2.9,1.625) 4(-2.9,0.975) 5(-2.9,0.325) 6(-2.9,-0.325) 7(-2.9,-0.975) 8(-2.9,-1.625) 9(-2.9,-2.275) 10(-2.9,-2.925) 11(2.9,-2.925) 12(2.9,-2.275) 13(2.9,-1.625) 14(2.9,-0.975) 15(2.9,-0.325) 16(2.9,0.325) 17(2.9,0.975) 18(2.9,1.625) 19(2.9,2.275) 20(2.9,2.925)
  silkscreen extent -3.02,-3.3 1.5,3.77, body extent -2.25,-3.3 2.25,3.3, height 1.1
TSSOP-14_PW [mm] "TSOP, 14-Leads, Body 5.1x4.5mm (max), Pitch 0.65mm, IPC Medium Density"
  oval 1.7x0.35 smd: 1(-2.85,1.95) 2(-2.85,1.3) 3(-2.85,0.65) 4(-2.85,0) 5(-2.85,-0.65) 6(-2.85,-1.3) 7(-2.85,-1.95) 8(2.85,-1.95) 9(2.85,-1.3) 10(2.85,-0.65) 11(2.85,0) 12(2.85,0.65) 13(2.85,1.3) 14(2.85,1.95)
  silkscreen extent -2.97,-2.55 1.6,2.8, body extent -2.25,-2.55 2.25,2.55, height 1.2
TSSOP-16_PW [mm] "TSOP, 16-Leads, Body 5.1x4.5mm (max), Pitch 0.65mm, IPC Medium Density"
  oval 1.7x0.35 smd: 1(-2.85,2.275) 2(-2.85,1.625) 3(-2.85,0.975) 4(-2.85,0.325) 5(-2.85,-0.325) 6(-2.85,-0.975) 7(-2.85,-1.625) 8(-2.85,-2.275) 9(2.85,-2.275) 10(2.85,-1.625) 11(2.85,-0.975) 12(2.85,-0.325) 13(2.85,0.325) 14(2.85,0.975) 15(2.85,1.625) 16(2.85,2.275)
  silkscreen extent -2.97,-2.55 1.6,3.12, body extent -2.25,-2.55 2.25,2.55, height 1.2
TSSOP-20_PW [mm] "TSOP, 20-Leads, Body 6.6x4.5mm (max), Pitch 0.65mm, IPC Medium Density"
  oval 1.7x0.35 smd: 1(-2.85,2.925) 2(-2.85,2.275) 3(-2.85,1.625) 4(-2.85,0.975) 5(-2.85,0.325) 6(-2.85,-0.325) 7(-2.85,-0.975) 8(-2.85,-1.625) 9(-2.85,-2.275) 10(-2.85,-2.925) 11(2.85,-2.925) 12(2.85,-2.275) 13(2.85,-1.625) 14(2.85,-0.975) 15(2.85,-0.325) 16(2.85,0.325) 17(2.85,0.975) 18(2.85,1.625) 19(2.85,2.275) 20(2.85,2.925)
  silkscreen extent -2.97,-3.3 1.6,3.77, body extent -2.25,-3.3 2.25,3.3, height 1.2
VSSOP-8 [mm] "TSSOP, 8-Leads, Body 2.1x2.4mm (max), Pitch 0.50mm, IPC Medium Density"
  oval 1.3x0.3 smd: 1(-1.3,0.75) 2(-1.3,0.25) 3(-1.3,-0.25) 4(-1.3,-0.75) 5(1.3,-0.75) 6(1.3,-0.25) 7(1.3,0.25) 8(1.3,0.75)
  silkscreen extent -1.42,-1.05 0.25,1.57, body extent -1.2,-1.05 1.2,1.05, height 1
WE-PD [mm] "Inductor 7.6x7.6mm"
  rect 2.5x1.85 smd: 1(-3.125,0) 2(3.125,0)
  silkscreen extent -3.8,-3.8 3.8,3.8

## Part data
A0 A1 A2 A3 A4 A5 A6 A7 A8 A+ CTS DRDY MISO MOSI PS PWM RTS RX0 SCK SCL SDA SSEL SW1_1 SW2_1 TX0: library part JP_pad, "Pad"
A+_1 A- BAT+ BAT- M1+ M1- M2+ M2- M3+ M3- M4+ M4-: library part JP_BOOZ_PAD, "Pad for booz power board"
C1 C1_1 C1_2 C2 C2_1 C4 C5_1 C6_1 C8 C9_1 C10_1 C11_1 C15 C21 C22 C25 C28 C29 C30 C31 C32 C33 C34 C35 C36 C37: library part "CP_100nF 0603", "CAP CER .10UF 50V X5R 0603"
C2_2: "CAP CER 10uF 25V X5R 1206"
C3 C3_1: library part "CP_1uF 0603", "CAP CER 1.0UF 50V X5S 0603"
C5 C11 C12 C19: "CAP CER .47UF 25V X5R 0603"
C6 C7 C13 C14: library part "CP_10uF 0805", "CAP 10uF 10% 10V X5R 0805"
C7_1 C8_1: "Capacitor"
C9 C16 C23: "CAP CER 2u2 50V Y5V 1206"
C10 C17: "CAP 330PF 50V CERAMIC X7R 0603"
C13_1: "Polarized Capacitor (Radial)"
C18 C20 C24: library part CP_TANT_10uF_1206, "CAP 10uF 20% 10V 300mOhm 1206"
C26 C27: library part "CP_18pF 0603", "CAP CER 18PF 50V 5% C0G 0603"
CAM1: library part "JP_7PIN HDR_SMT_RA_MOLEX", "CONN HDR VERT 7POS .100\" SNGL"
D1 D4 D6 D8: library part DS_B240A-13-F, "Schottky Diode - 2A/40V"
D1_1: library part DS_BAS70, "DIODE SCHOTTKY 70V 200MA SOT23"
D2: library part DS_SS2H10-E3/52T, "Schottky Diode - 2A/100V"
D3 D7 D13 D14 D15 D16: library part "DL_LED Green 0805", "Green LED 0805"
D5 D9: library part "DZ_40v TVS", "DIODE TVS 40V 600W UNIDIR  SMB"
D10: library part DS_MBR0520LT1G, "DIODE SCHOTTKY 20V 0.5A SOD123"
D11: library part "DL_LED 1.7V Red 0805", "Red LED 1.7V 0805"
D12: library part "DL_LED Red 0805", "Red LED 0805"
JP1: library part UN_GUMSTIX_OVERO_EARTH, "Gumstix Overo OMAP35xx Computer Module"
L1 L2: library part "IN_10uH 2A SMT", "INDUCTOR POWER 10UH 2.0A SMD"
L3 L4: library part "IN_22uH 100mA 0805", "Inductor 22uH 100mA 10% 0805"
P1 P1_1 P2_1 P4: library part "JP_2PIN HDR_SMT_RA_MOLEX", "CONN HDR VERT 2POS .100\" SNGL"
P2 P3: library part "JP_MINIUSB type B_1", "MINI-USB Type B Single Connector"
P5 P6 P7 P12 P13: library part "JP_4PIN HDR_SMT_RA_MOLEX", "CONN HDR VERT 4POS .100\" SNGL"
P8: library part "JP_12PIN HDR_SMT_RA_MOLEX", "CONN HDR VERT 12POS .100\" SNGL"
P9 P10 UART_1: library part "JP_6PIN HDR_SMT_RA_MOLEX", "CONN HDR VERT 6POS .100\" SNGL"
P11: library part "JP_2PIN HDR_SMT_RA_MOLEX"
"PCB LOGO S1": "GRC Logo 20x10mm"
Q1 Q1_1 Q2: library part TN_BC847, "TRANS NPN GP 100MA 45V SOT23"
Q2_1: library part TF_FDB8442, "MOSFET N-CH 40V 80A D2PAK"
R1: library part "RS_24k9 0603", "RES 24.9K OHM 1/10W 1% 0603 SMD"
R1_1: library part "RS_220R 1206", "RES 220 OHM 1/4W 1% 1206 SMD"
R2 R28: library part "RS_150R 0603", "RES 150 OHM 1/10W 1% 0603 SMD"
R2_1 R4_1 R6 R9_1 R10_1 R33 R34 R35 R41 R42 R43 R44 R45 R46 R50 R51 R52 R54: library part "RS_0R0 0603", "RES 0.0 OHM 1/10W 5% 0603 SMD"
R2_2: library part "RS_470k 0603", "RES 470K OHM 1/10W 5% 0603 SMD"
R3 R10: library part "RS_8k06 0603", "RES 8k06 OHM 1/10W 1% 0603 SMD"
R3_1: library part "RS_10k 1206", "RES 10.0K OHM 1/4W 1% 1206 SMD"
R4 R11: library part "RS_53k6 0603", "RES 53.6K OHM 1/10W 1% 0603 SMD"
R4_2: library part "RS_1M 0603", "RES 1.00M OHM 1/10W 1% 0603 SMD"
R5 R12: library part "RS_40k2 0603", "RES 40.2K OHM 1/10W 1% 0603 SMD"
R5_1 R6_1 R7_1 R8_1 R13: library part "RS_0R0 0603", "RES 0.0 OHM 1/10W 5% 1206 SMD"
R5_2: library part "RS_10k 0603", "RES 10.0K OHM 1/10W 1% 0603 SMD"
R7: library part "RS_1k 0603", "RES 1.00K OHM 1/10W 1% 0603 SMD"
R8: library part "RS_42k2 0603", "RES 42.2K OHM 1/10W 1% 0603 SMD"
R9 R29: library part "RS_330R 0603", "RES 330 OHM 1/10W 1% 0603 SMD"
R11_1 R12_1 R16 R20 R21 R22 R23 R24 R25 R31 R32: library part "RS_100k 0603", "RES 100K OHM 1/10W 1% 0603 SMD"
R26: library part "RS_180R 0603", "RES 180OHM 1/10W 1% 0603 SMD"
R27 R30: library part "RS_5k6 0603", "RES 5.6K OHM 1/10W 5% 0603 SMD"
R36 R37 R38 R39 R40: library part "RS_10k 0603_1", "RES 10.0K OHM 1/10W 1% 0603 SMD"
R53: library part "RS_523R 0603", "RES 523 OHM 1/10W 1% 0603 SMD"
S1 S2 S3 S4 S5 S6 S7 S8: library part "JP_3PIN HDR", "CONN HDR VERT 3POS .100\" SNGL"
SPI_1: library part "JP_8PIN HDR_SMT_RA_MOLEX", "CONN HDR VERT 12POS .100\" SNGL"
SW1 SW1_2 SW2: library part "SW_TACT 3MM RT", "SWITCH TACT RT ANG SPST SMD"
U1 U2: "IC REG STP-DWN 2A 12-DFN"
U1_1: "100 mA, SOT-23, Quasi Low-Dropout Linear Voltage Regulator"
U2_1: library part IC_AD7997, "10-bit 8 channel ADC"
U3: library part IC_MIC5247-1.8YM5, "1.8V linear regulator"
U3_1: library part IC_MAX3100, "SPI UART"
U4: library part IC_LM2665, "Switched Capacitor Voltage Converter"
U4_1: "Decade Counter/Divider with 10 Decoded Outputs"
U5: library part IC_SC16C852LIB-S, "Dual high speed UARTs, bus connected"
U6: library part IC_PCA9306DC, "IC LEVEL TRANSLATOR I2C BUS 8VSSOP"
U7 U8: "IC VOLT-LEVEL TRANSLATOR 16TSSOP"
U9: "IC VOLT-LEVEL TRANSLATOR 14TSSOP"
U10: "IC VOLT-LEVEL TRANSLATOR 20TSSOP"
UART: library part "JP_4PIN HDR_SMT_RA_MOLEX_1", "CONN HDR VERT 4POS .100\" SNGL"
Y1: library part XT_18.432MHZ, "CRYSTAL 18.432MHZ LOW PRO SMD"
Y1_1: library part XTAL, "Crystal Oscillator"

## Free pads (board coordinates)
  round 0 hole 118.11: ""(1500,1500) ""(1500,3224.41) ""(3224.41,1500) ""(3224.41,3224.41) ""(4000,1500) ""(4000,3224.41) ""(5724.41,1500) ""(5724.41,3224.41) ""(6100,1500) ""(6100,3224.41) ""(7824.41,1500) ""(7824.41,3224.41)
  round 59.06 hole 35.43: ""(4100,1650) ""(4100,1750) ""(4100,1850) ""(4100,1950) ""(4100,2050) ""(4100,2150) ""(4100,2250) ""(4100,2350) ""(4200,1450) ""(4200,1550) ""(4200,1650) ""(4200,1750) ""(4200,1850) ""(4200,1950) ""(4200,2050) ""(4200,2150) ""(4200,2250) ""(4200,2350) ""(4300,1450) ""(4300,1550) ""(4300,1650) ""(4300,1750) ""(4300,1850) ""(4300,1950) ""(4300,2050) ""(4300,2150) ""(4300,2250) ""(4300,2350) ""(4300,2450) ""(4300,2550) ""(4300,2650) ""(4400,1450) ""(4400,1550) ""(4400,1650) ""(4400,1750) ""(4400,1850) ""(4400,1950) ""(4400,2050) ""(4400,2150) ""(4400,2250) ""(4400,2350) ""(4400,2450) ""(4400,2550) ""(4400,2650) ""(4500,1450) ""(4500,1550) ""(4500,1650) ""(4500,1750) ""(4500,1850) ""(4500,1950) ""(4500,2050) ""(4500,2150) ""(4500,2250) ""(4500,2350) ""(4500,2450) ""(4500,2550) ""(4500,2650) ""(4600,1450) ""(4600,1550) ""(4600,1650) ""(4600,1750) ""(4600,1850) ""(4600,1950) ""(4600,2050) ""(4600,2150) ""(4600,2250) ""(4600,2350) ""(4600,2450) ""(4600,2550) ""(4600,2650) ""(4700,1450) ""(4700,1550) ""(4700,1650) ""(4700,1750) ""(4700,1850) ""(4700,1950) ""(4700,2050) ""(4700,2150) ""(4700,2250) ""(4700,2350) ""(4700,2450) ""(4700,2550) ""(4700,2650) ""(4800,1450) ""(4800,1550) ""(4800,1650) ""(4800,1750) ""(4800,1850) ""(4800,1950) ""(4800,2050) ""(4800,2150) ""(4800,2250) ""(4800,2350) ""(4800,2450) ""(4800,2550) ""(4800,2650) ""(4900,1450) ""(4900,1550) ""(4900,1650) ""(4900,1750) ""(4900,1850) ""(4900,1950) ""(4900,2050) ""(4900,2150) ""(4900,2250) ""(4900,2350) ""(4900,2450) ""(4900,2550) ""(4900,2650) ""(5000,1450) ""(5000,1550) ""(5000,1650) ""(5000,1750) ""(5000,1850) ""(5000,1950) ""(5000,2050) ""(5000,2150) ""(5000,2250) ""(5000,2350) ""(5000,2450) ""(5000,2550) ""(5000,2650) ""(5000,2750) ""(5100,1450) ""(5100,1550) ""(5100,1650) ""(5100,1750) ""(5100,1850) ""(5100,1950) ""(5100,2050) ""(5100,2150) ""(5100,2250) ""(5100,2350) ""(5100,2450) ""(5100,2550) ""(5100,2650) ""(6484.33,3120.83) ""(6574.33,3120.83) ""(6664.33,2685.83) ""(6664.33,2935.83) ""(6664.33,3120.83) ""(6754.33,2685.83) ""(6754.33,2935.83) ""(6754.33,3120.83)

## Via types
v1: diameter 30, hole 15, Top Layer to Bottom Layer, 126 vias
v2: diameter 50, hole 28, Top Layer to Bottom Layer, 82 vias

## Nets (pads, with @x,y where several pads share a name; then routed paths per layer and width w, separated by ;. In a path a pad name is that pad's centre, name@x,y a point inside that pad or via, vN(x,y) a via of type N, cw(c..) or ccw(c..) an arc to the next point about the centre after c; other vN are vias at no path point)
pads on no net: "CAM1. " "P1. " "P1_1. " "P2_1. " "P4. " "P5. " "P6. " "P7. " "P8. " "P9. " "P10. " "P12. " "P13. " "SPI_1. " "UART. " "UART_1. " A0.1 A1.1 A2.1 A3.1 A4.1 A5.1 A6.1 A7.1 A8.1 A+.1 A+_1.1 A-.1 BAT+.1 BAT-.1 C1.1 C1.2 C1_1.1 C1_1.2 C1_2.1 C1_2.2 C2.1 C2.2 C2_1.1 C2_1.2 C2_2.1 C2_2.2 C3.1 C3.2 C3_1.1 C3_1.2 C4.1 C4.2 C5.1 C5.2 C5_1.1 C5_1.2 C6.1 C6.2 C6_1.1 C6_1.2 C7.1 C7.2 C7_1.1 C7_1.2 C8.1 C8.2 C8_1.1 C8_1.2 C9.1 C9.2 C9_1.1 C9_1.2 C10.1 C10.2 C10_1.1 C10_1.2 C11.1 C11.2 C11_1.1 C11_1.2 C12.1 C12.2 C13.1 C13.2 C13_1.1 C13_1.2 C14.1 C14.2 C15.1 C15.2 C16.1 C16.2 C17.1 C17.2 C18.1 C18.2 C19.1 C19.2 C20.1 C20.2 C21.1 C21.2 C22.1 C22.2 C23.1 C23.2 C24.1 C24.2 C25.1 C25.2 C26.1 C26.2 C27.1 C27.2 C28.1 C28.2 C29.1 C29.2 C30.1 C30.2 C31.1 C31.2 C32.1 C32.2 C33.1 C33.2 C34.1 C34.2 C35.1 C35.2 C36.1 C36.2 C37.1 C37.2 CAM1. CAM1.1 CAM1.2 CAM1.3 CAM1.4 CAM1.5 CAM1.6 CAM1.7 CTS.1 D1.1 D1.2 D1_1.1 D1_1.2 D1_1.3 D2.1 D2.2 D3.1 D3.2 D4.1 D4.2 D5.1 D5.2 D6.1 D6.2 D7.1 D7.2 D8.1 D8.2 D9.1 D9.2 D10.1 D10.2 D11.1 D11.2 D12.1 D12.2 D13.1 D13.2 D14.1 D14.2 D15.1 D15.2 D16.1 D16.2 DRDY.1 JP1.1 JP1.2 JP1.3 JP1.4 JP1.5 JP1.6 JP1.7 JP1.8 JP1.9 JP1.10 JP1.11 JP1.12 JP1.13 JP1.14 JP1.15 JP1.16 JP1.17 JP1.18 JP1.19 JP1.20 JP1.21 JP1.22 JP1.23 JP1.24 JP1.25 JP1.26 JP1.27 JP1.28 JP1.29 JP1.30 JP1.31 JP1.32 JP1.33 JP1.34 JP1.35 JP1.36 JP1.36_ JP1.37 JP1.37_ JP1.38 JP1.38_ JP1.39 JP1.39_ JP1.40 JP1.40_ JP1.41 JP1.41_ JP1.42 JP1.42_ JP1.43 JP1.43_ JP1.44 JP1.44_ JP1.45 JP1.45_ JP1.46 JP1.46_ JP1.47 JP1.47_ JP1.48 JP1.48_ JP1.49 JP1.49_ JP1.50 JP1.50_ JP1.51 JP1.51_ JP1.52 JP1.52_ JP1.53 JP1.53_ JP1.54 JP1.54_ JP1.55 JP1.55_ JP1.56 JP1.56_ JP1.57 JP1.57_ JP1.58 JP1.58_ JP1.59 JP1.59_ JP1.60 JP1.60_ JP1.61 JP1.61_ JP1.62 JP1.62_ JP1.63 JP1.63_ JP1.64 JP1.64_ JP1.65 JP1.65_ JP1.66 JP1.66_ JP1.67 JP1.67_ JP1.68 JP1.68_ JP1.69 JP1.69_ JP1.70 JP1.70_ JP1._1 JP1._2 JP1._3 JP1._4 JP1._5 JP1._6 JP1._7 JP1._8 JP1._9 JP1._10 JP1._11 JP1._12 JP1._13 JP1._14 JP1._15 JP1._16 JP1._17 JP1._18 JP1._19 JP1._20 JP1._21 JP1._22 JP1._23 JP1._24 JP1._25 JP1._26 JP1._27 JP1._28 JP1._29 JP1._30 JP1._31 JP1._32 JP1._33 JP1._34 JP1._35 JP1.A JP1.B JP1.E JP1.F JP1.G JP1.H L1.1 L1.2 L2.1 L2.2 L3.1 L3.2 L4.1 L4.2 M1+.1 M1-.1 M2+.1 M2-.1 M3+.1 M3-.1 M4+.1 M4-.1 MISO.1 MOSI.1 P1. P1.1 P1.2 P1_1. P1_1.1 P1_1.2 P2.1 P2.2 P2.3 P2.4 P2.5 P2.6 P2_1. P2_1.1 P2_1.2 P3.1 P3.2 P3.3 P3.4 P3.5 P3.6 P4. P4.1 P4.2 P5. P5.1 P5.2 P5.3 P5.4 P6. P6.1 P6.2 P6.3 P6.4 P7. P7.1 P7.2 P7.3 P7.4 P8. P8.1 P8.2 P8.3 P8.4 P8.5 P8.6 P8.7 P8.8 P8.9 P8.10 P8.11 P8.12 P9. P9.1 P9.2 P9.3 P9.4 P9.5 P9.6 P10. P10.1 P10.2 P10.3 P10.4 P10.5 P10.6 P11.1 P11.2 P12. P12.1 P12.2 P12.3 P12.4 P13. P13.1 P13.2 P13.3 P13.4 PS.1 PWM.1 Q1.1 Q1.2 Q1.3 Q1_1.1 Q1_1.2 Q1_1.3 Q2.1 Q2.2 Q2.3 Q2_1.1 Q2_1.3 Q2_1.4 R1.1 R1.2 R1_1.1 R1_1.2 R2.1 R2.2 R2_1.1 R2_1.2 R2_2.1 R2_2.2 R3.1 R3.2 R3_1.1 R3_1.2 R4.1 R4.2 R4_1.1 R4_1.2 R4_2.1 R4_2.2 R5.1 R5.2 R5_1.1 R5_1.2 R5_2.1 R5_2.2 R6.1 R6.2 R6_1.1 R6_1.2 R7.1 R7.2 R7_1.1 R7_1.2 R8.1 R8.2 R8_1.1 R8_1.2 R9.1 R9.2 R9_1.1 R9_1.2 R10.1 R10.2 R10_1.1 R10_1.2 R11.1 R11.2 R11_1.1 R11_1.2 R12.1 R12.2 R12_1.1 R12_1.2 R13.1 R13.2 R16.1 R16.2 R20.1 R20.2 R21.1 R21.2 R22.1 R22.2 R23.1 R23.2 R24.1 R24.2 R25.1 R25.2 R26.1 R26.2 R27.1 R27.2 R28.1 R28.2 R29.1 R29.2 R30.1 R30.2 R31.1 R31.2 R32.1 R32.2 R33.1 R33.2 R34.1 R34.2 R35.1 R35.2 R36.1 R36.2 R37.1 R37.2 R38.1 R38.2 R39.1 R39.2 R40.1 R40.2 R41.1 R41.2 R42.1 R42.2 R43.1 R43.2 R44.1 R44.2 R45.1 R45.2 R46.1 R46.2 R50.1 R50.2 R51.1 R51.2 R52.1 R52.2 R53.1 R53.2 R54.1 R54.2 RTS.1 RX0.1 S1.1 S1.2 S1.3 S2.1 S2.2 S2.3 S3.1 S3.2 S3.3 S4.1 S4.2 S4.3 S5.1 S5.2 S5.3 S6.1 S6.2 S6.3 S7.1 S7.2 S7.3 S8.1 S8.2 S8.3 SCK.1 SCL.1 SDA.1 SPI_1. SPI_1.1 SPI_1.2 SPI_1.3 SPI_1.4 SPI_1.5 SPI_1.6 SPI_1.7 SPI_1.8 SSEL.1 SW1.0 SW1.1 SW1.2 SW1.3 SW1_1.1 SW1_2.0 SW1_2.1 SW1_2.2 SW1_2.3 SW2.0 SW2.1 SW2.2 SW2.3 SW2_1.1 TX0.1 U1.1 U1.2 U1.3 U1.4 U1.5 U1.6 U1.7 U1.8 U1.9 U1.10 U1.11 U1.12 U1.13 U1_1.1 U1_1.2 U1_1.3 U2.1 U2.2 U2.3 U2.4 U2.5 U2.6 U2.7 U2.8 U2.9 U2.10 U2.11 U2.12 U2.13 U2_1.1 U2_1.2 U2_1.3 U2_1.4 U2_1.5 U2_1.6 U2_1.7 U2_1.8 U2_1.9 U2_1.10 U2_1.11 U2_1.12 U2_1.13 U2_1.14 U2_1.15 U2_1.16 U2_1.17 U2_1.18 U2_1.19 U2_1.20 U3.1 U3.2 U3.3 U3.4 U3.5 U3_1.1 U3_1.2 U3_1.3 U3_1.4 U3_1.5 U3_1.6 U3_1.7 U3_1.8 U3_1.9 U3_1.10 U3_1.11 U3_1.12 U3_1.13 U3_1.14 U3_1.15 U3_1.16 U4.1 U4.2 U4.3 U4.4 U4.5 U4.6 U4_1.1 U4_1.2 U4_1.3 U4_1.4 U4_1.5 U4_1.6 U4_1.7 U4_1.8 U4_1.9 U4_1.10 U4_1.11 U4_1.12 U4_1.13 U4_1.14 U4_1.15 U4_1.16 U5.1 U5.2 U5.3 U5.4 U5.5 U5.6 U5.7 U5.8 U5.9 U5.10 U5.11 U5.12 U5.13 U5.14 U5.15 U5.16 U5.17 U5.18 U5.19 U5.20 U5.21 U5.22 U5.23 U5.24 U5.25 U5.26 U5.27 U5.28 U5.29 U5.30 U5.31 U5.32 U5.33 U5.34 U5.35 U5.36 U5.37 U5.38 U5.39 U5.40 U5.41 U5.42 U5.43 U5.44 U5.45 U5.46 U5.47 U5.48 U6.1 U6.2 U6.3 U6.4 U6.5 U6.6 U6.7 U6.8 U7.1 U7.2 U7.3 U7.4 U7.5 U7.6 U7.7 U7.8 U7.9 U7.10 U7.11 U7.12 U7.13 U7.14 U7.15 U7.16 U8.1 U8.2 U8.3 U8.4 U8.5 U8.6 U8.7 U8.8 U8.9 U8.10 U8.11 U8.12 U8.13 U8.14 U8.15 U8.16 U9.1 U9.2 U9.3 U9.4 U9.5 U9.6 U9.7 U9.8 U9.9 U9.10 U9.11 U9.12 U9.13 U9.14 U10.1 U10.2 U10.3 U10.4 U10.5 U10.6 U10.7 U10.8 U10.9 U10.10 U10.11 U10.12 U10.13 U10.14 U10.15 U10.16 U10.17 U10.18 U10.19 U10.20 UART. UART.1 UART.2 UART.3 UART.4 UART_1. UART_1.1 UART_1.2 UART_1.3 UART_1.4 UART_1.5 UART_1.6 Y1.1 Y1.2 Y1_1.1 Y1_1.2